# Altium PCB PCB-EtchingTester V1.PcbDoc
Units mil, origin at the board's own origin, x right, y up, seen from the top; angles counter-clockwise.
Board outline 1000 x 1000 mil, 2 copper layers (Top Layer, Bottom Layer); 10 components, 9 nets, 65 pads, 0 vias.
Unrouted connection lines stored in the file: 1.
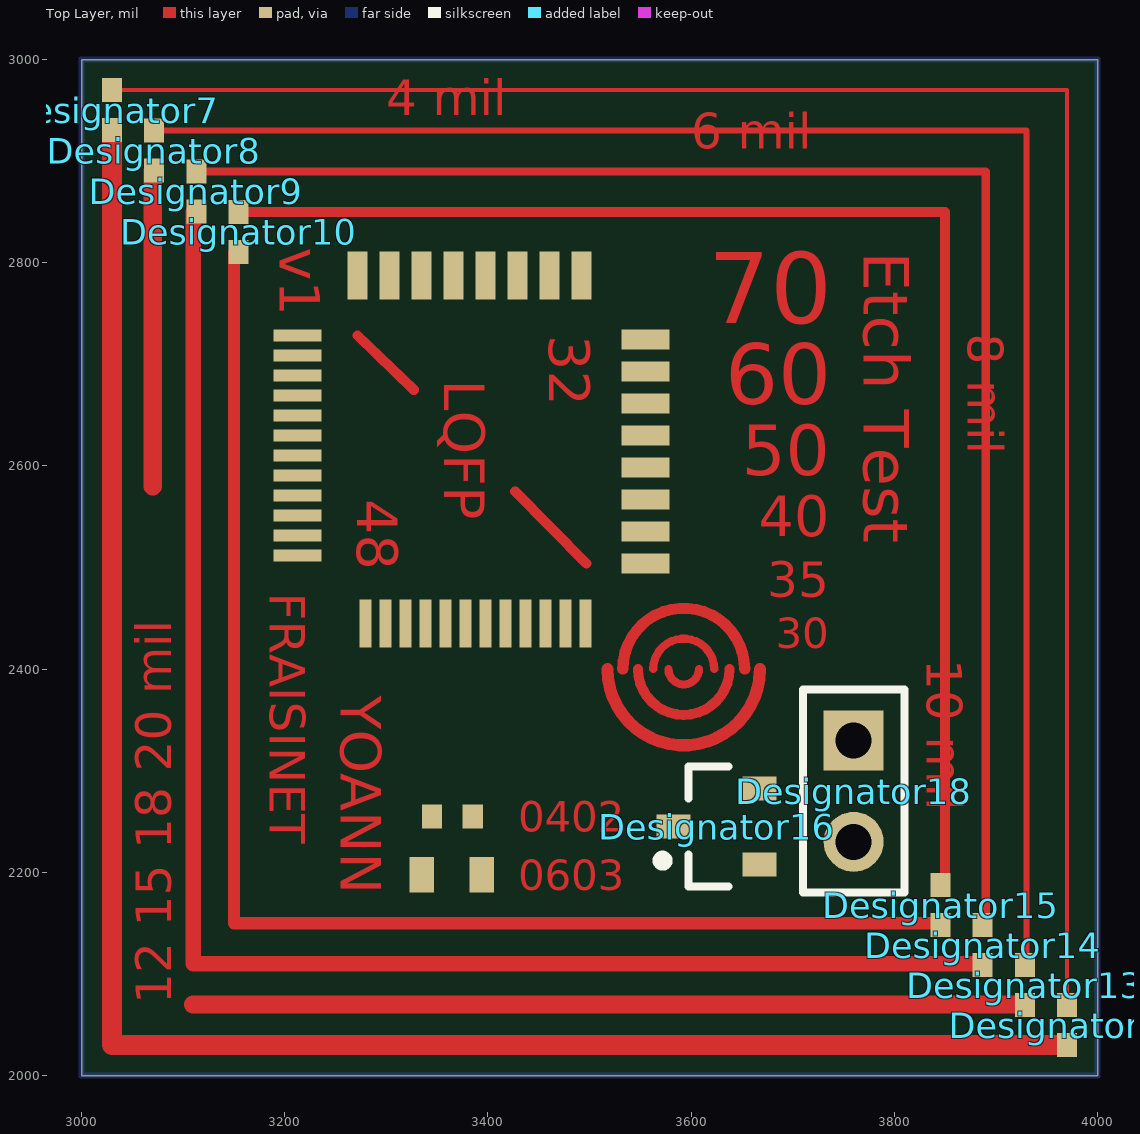
[diagram p0: Top Layer view]
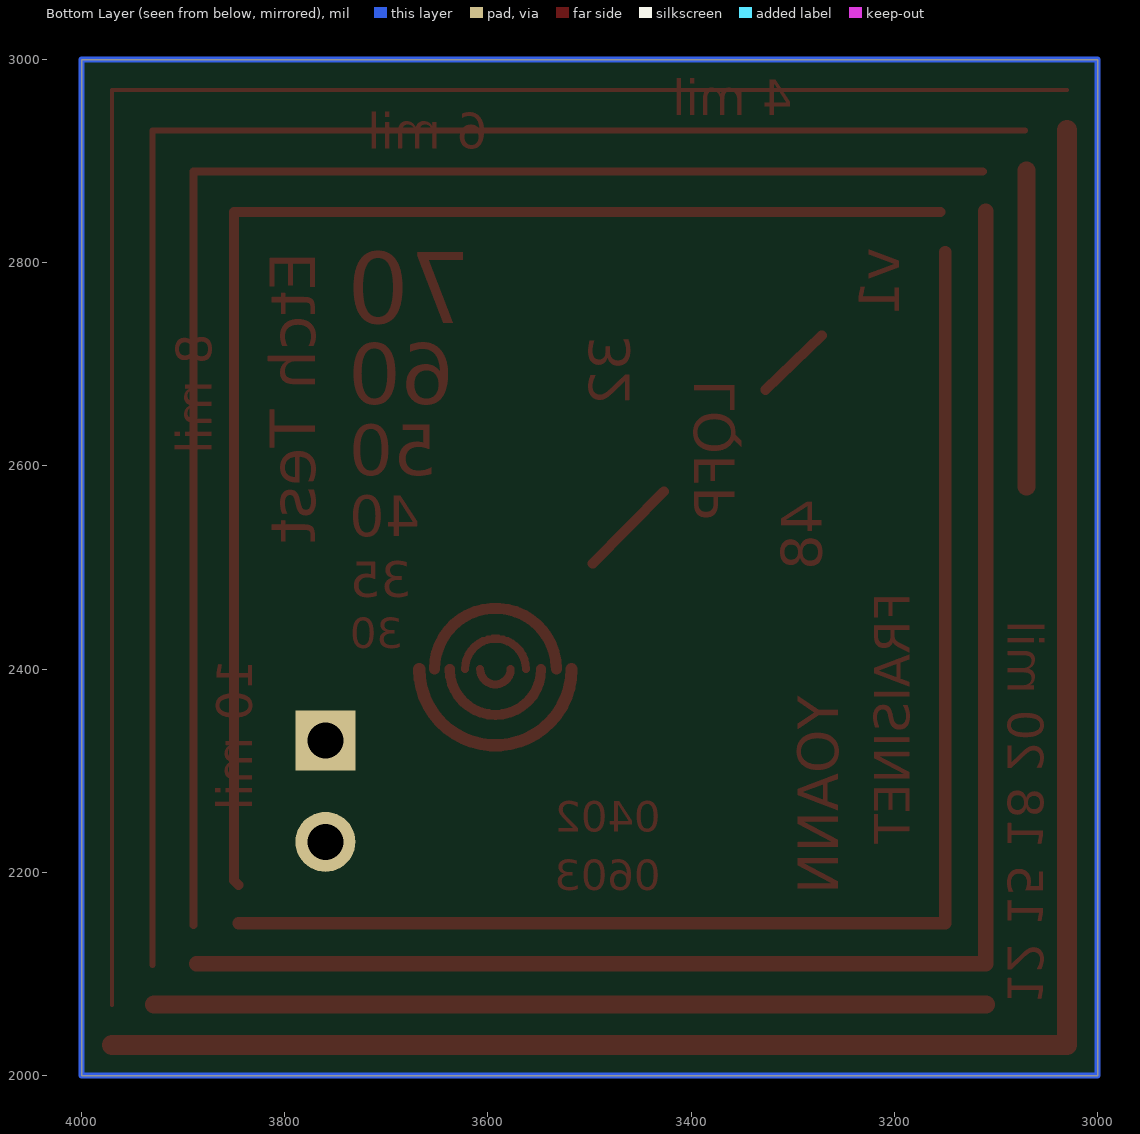
[diagram p1: Bottom Layer view, seen from below]

## Layer stack, top to bottom
Top Solder: solder mask 0.4, Solder Resist, Dk 3.5
Top Layer: signal copper 1.4
Dielectric 1: dielectric 12.6, FR-4, Dk 4.8
Bottom Layer: signal copper 1.4
Bottom Solder: solder mask 0.4, Solder Resist, Dk 3.5

## Board outline
3000,3000 3000,2000 4000,2000 4000,3000

## Design rules (kind name [scope] priority, off if disabled: settings)
Clearance [All] p1: gap=8 ignorepadtopadclearanceinfootprint=FALSE except(0: Arc-Text Track-Text; 5: SMDPad-SMDPad; 10: THPad-THPad)
PolygonConnect [All] p1: connectstyle=Relief reliefconductorwidth=10 reliefentries=4 polygonreliefangle="90 Angle" airgapwidth=10
RoutingVias [All] p1: holewidth=28 width=50 viastyle="Through Hole" minholewidth=28 minwidth=50 maxholewidth=28 maxwidth=50
SolderMaskExpansion [All] p1: expansion=4
Width [All] p1: maxlimit=50 minlimit=4 preferedwidth=8
30 further rules are at their usual default settings.

## Components (designator, comment, footprint, x,y, rotation, side; value= is the part's Value field where it differs from the comment)
Designator7 "Comment" 0402 3030,2950.31 r90 top
Designator8 "Comment" 0402 3071.51,2910.31 r90 top
Designator9 "Comment" 0402 3113.01,2870.31 r90 top
Designator10 "Comment" 0402 3154.52,2830.31 r90 top
Designator12 "Comment" 0402 3970,2049.68 r90 top
Designator13 "Comment" 0402 3928.49,2089.06 r90 top
Designator14 "Comment" 0402 3886.99,2128.43 r90 top
Designator15 "Comment" 0402 3845.48,2167.8 r90 top
Designator16 "Comment" SOT23_L 3625,2245 r180 top
Designator18 "Comment" HDR1X2 3760,2330 r270 top

## Footprints (in the part's own frame and the unit in brackets; to place one, negate y for a bottom-side part, rotate by r counter-clockwise, add the part's x,y. Pads: shape width x height; smd on the part's side, far side on the other; paste and mask are expansions set on the pad)
0402 [mm] "Chip Capacitor, Body 1.0x0.5mm, IPC High Density"
  rect 0.6x0.5 smd: 1(-0.5,0) 2(0.5,0)
  body extent -0.55,-0.3 0.55,0.3, height 1.3
HDR1X2 [mm] "Connector; Header; 2 Position"
  rect 1.5x1.5 hole 0.9: 1(0,0)
  round 1.5 hole 0.9: 2(2.54,0)
  silkscreen extent -1.27,-1.27 3.81,1.27
SOT23_L [mm] "SOT23, 3-Leads, Body 2.9x1.3mm, Pitch 0.95mm, Lead Span 2.3mm - Reverse Pinning, IPC High Density"
  rect 0.85x0.6 smd: 1(1.075,0) 2(-1.075,-0.95) 3(-1.075,0.95)
  silkscreen extent -0.3,-1.5 1.47,1.5, body extent -0.7,-1.5 0.7,1.5, height 1.1

## Free pads (board coordinates)
  rect 47.24x19.68 smd: 4(3555,2724.49) 5(3555,2692.99) 6(3555,2661.5) 7(3555,2630) 8(3555,2598.5) 9(3555,2567.01) 10(3555,2535.51) 11(3555,2504.02)
  rect 19.68x47.24 smd: 12(3492.01,2787.48) 13(3460.51,2787.48) 14(3429.02,2787.48) 15(3397.52,2787.48) 16(3366.02,2787.48) 17(3334.53,2787.48) 18(3303.03,2787.48) 19(3271.54,2787.48)
  rect 11.81x47.24 smd: 20(3495.94,2444.96) 40(3476.26,2444.96) 41(3456.57,2444.96) 42(3436.89,2444.96) 43(3417.2,2444.96) 44(3397.52,2444.96) 45(3377.83,2444.96) 46(3358.15,2444.96) 47(3338.46,2444.96) 48(3318.78,2444.96) 49(3299.09,2444.96) 50(3279.41,2444.96)
  rect 47.24x11.81 smd: 21(3212.48,2728.43) 28(3212.48,2708.74) 29(3212.48,2689.06) 30(3212.48,2669.37) 31(3212.48,2649.68) 32(3212.48,2630) 33(3212.48,2610.31) 34(3212.48,2590.63) 35(3212.48,2570.94) 36(3212.48,2551.26) 37(3212.48,2531.57) 38(3212.48,2511.89)
  rect 24x35 smd: 51(3335,2197.6) 52(3394,2197.6)
  rect 20x24 smd: 53(3385,2255) 54(3345,2255)

## Nets (pads, with @x,y where several pads share a name; then routed paths per layer and width w, separated by ;. In a path a pad name is that pad's centre, name@x,y a point inside that pad or via, vN(x,y) a via of type N, cw(c..) or ccw(c..) an arc to the next point about the centre after c; other vN are vias at no path point)
4mil: Designator7.2 Designator12.2 | length 1840.6
  Top Layer w4: Designator7.2 3970,2970 Designator12.2
6mil: Designator8.2 Designator13.2 | length 1679.8
  Top Layer w6: Designator8.2 3930,2930 Designator13.2@3930,2108.74
8mil: Designator9.2 Designator14.2 | length 1518.9
  Top Layer w8: Designator9.2 3890,2890 Designator14.2@3890,2148.11
10mil: Designator10.2 Designator15.2 | length 1359.9
  Top Layer w10: Designator10.2 3850,2850 3850,2192 Designator15.2
12mil: Designator10.1 Designator15.1 | length 1356.1
  Top Layer w12: Designator10.1@3150,2810.63 3150,2150 Designator15.1@3845.48,2150
15mil: Designator9.1 Designator14.1 | length 1517.6
  Top Layer w15: Designator9.1@3110,2850.63 3110,2110 Designator14.1@3886.99,2110
18mil: Designator8.1 Designator13.1 | length 1129.1
  Top Layer w18: 3070,2580 Designator8.1@3070,2890.63 ; 3110,2070 Designator13.1@3928.49,2070
20mil: Designator7.1 Designator12.1 | length 1840.6
  Top Layer w20: Designator7.1 3030,2030 Designator12.1
Border:  | length 4000
  Bottom Layer w6: 3000,2000 4000,2000 4000,3000 3000,3000 3000,2000
pads on no net: Designator16.1 Designator16.2 Designator16.3 Designator18.1 Designator18.2
copper on no net: | length 883.5
  Top Layer w8: 3562.68,2400 cw(c3592.68,2400) 3622.68,2400 ; 3577.68,2400 ccw(c3592.68,2400) 3607.68,2400
  Top Layer w10: 3271.54,2728.43 3326.89,2674.96 ; 3426.89,2574.96 3496.89,2504.02 ; 3547.68,2400 ccw(c3592.68,2400) 3637.68,2400
  Top Layer w11: 3532.68,2400 cw(c3592.68,2400) 3652.68,2400
  Top Layer w12: 3517.68,2400 ccw(c3592.68,2400) 3667.68,2400

## Other copper
Top Layer:
  text "4 mil" at 3300,2945 h35
  text "6 mil" at 3600,2912 h35
  text "v1" at 3195,2815 h40 r270
  text "Etch Test" at 3770,2810.63 h45 r270
  text "70" at 3616.66,2740.63 h70
  text "8 mil" at 3872,2730 h35 r270
  text "32" at 3460.51,2728.43 h40 r270
  text "LQFP" at 3356.89,2684.96 h40 r270
  text "60" at 3633.32,2660.63 h60
  text "50" at 3649.98,2590.63 h50
  text "48" at 3271.54,2567.01 h40 r270
  text "40" at 3666.65,2530.63 h40
  text "FRAISINET" at 3185,2475 h35 r270
  text "35" at 3674.98,2470.63 h35
  text "30" at 3683.31,2420.63 h30
  text "10 mil" at 3832,2410 h35 r270
  text "YOANN" at 3255,2374.03 h40 r270
  text "0402" at 3430,2240 h30
  text "0603" at 3430,2182.6 h30
  text "12 15 18 20 mil" at 3088.5,2070 h35 r90